# Altium PCB PCB_Fungnator.PcbDoc
Units mm, origin at the board's own origin, x right, y up, seen from the top; angles counter-clockwise.
Board outline 112.78 x 81.28 mm, 2 copper layers (Top Layer, Bottom Layer); 20 components, 21 nets, 100 pads, 0 vias.
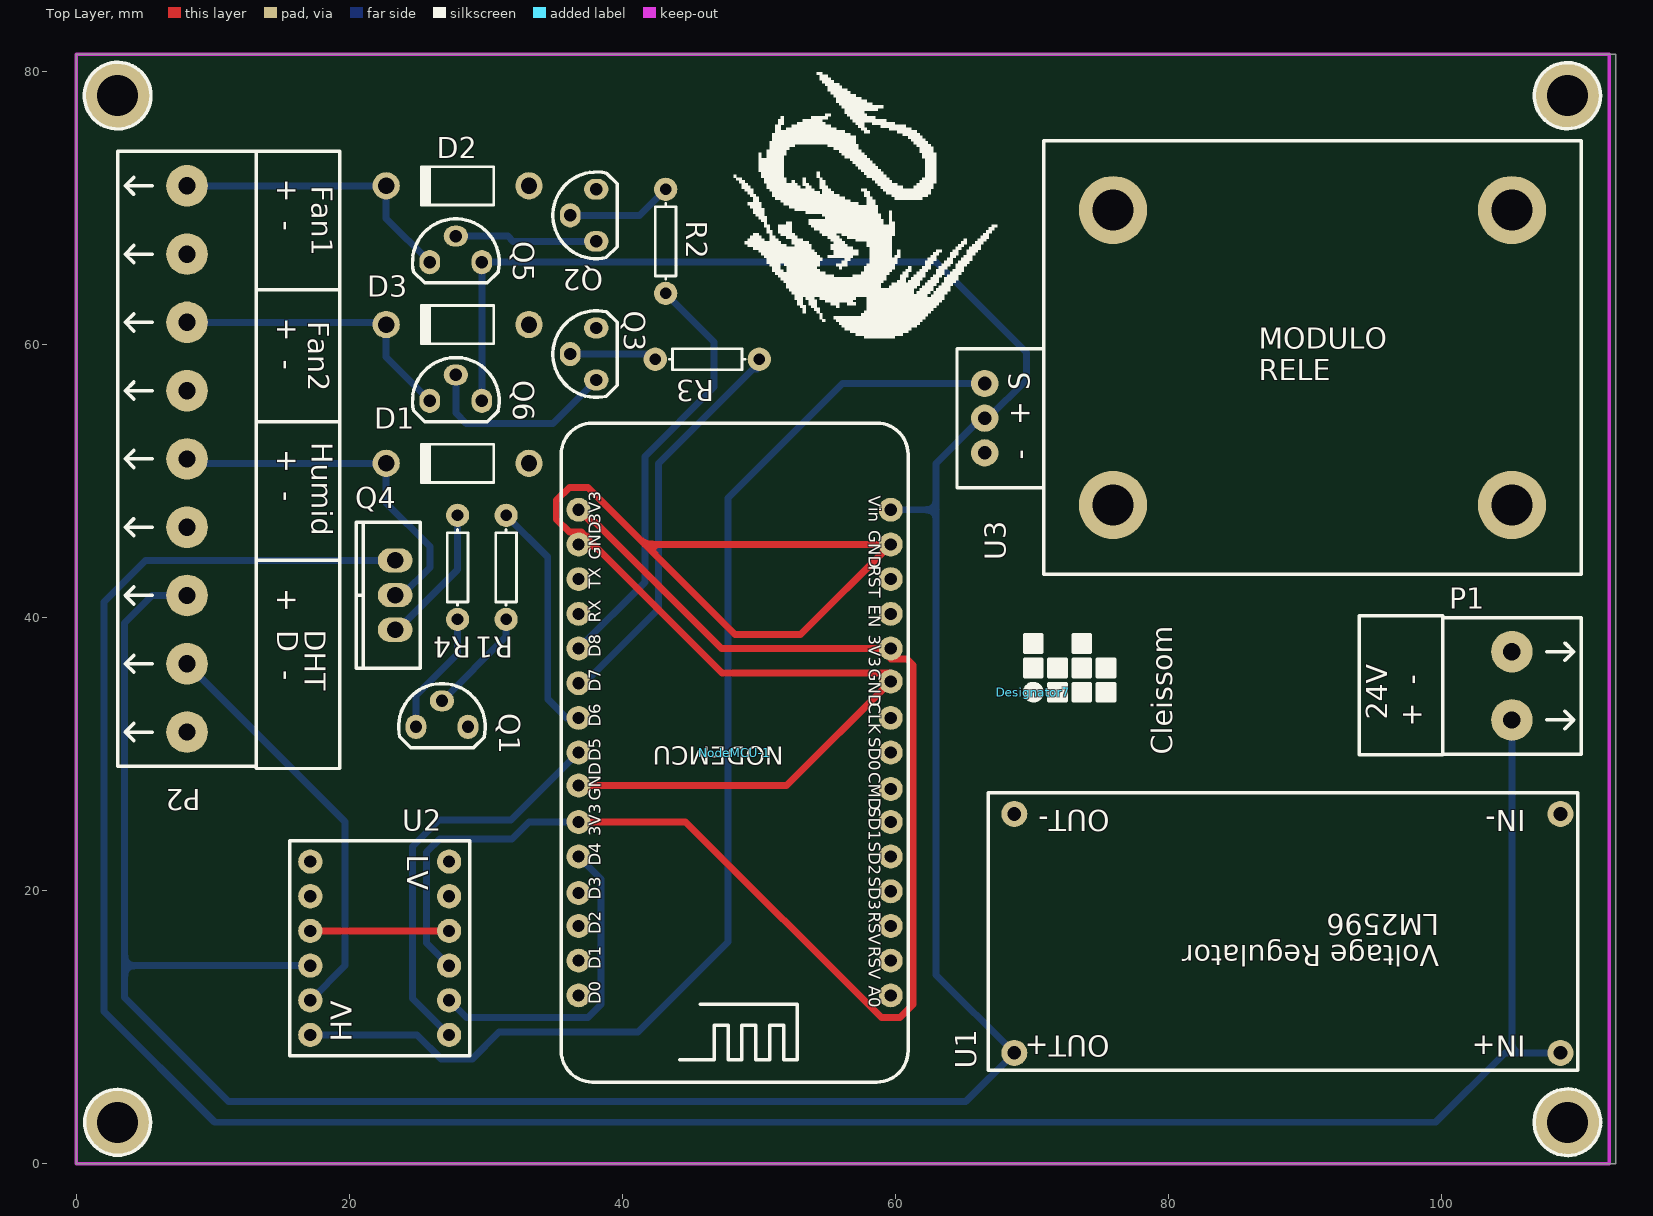
[diagram p0: Top Layer view]
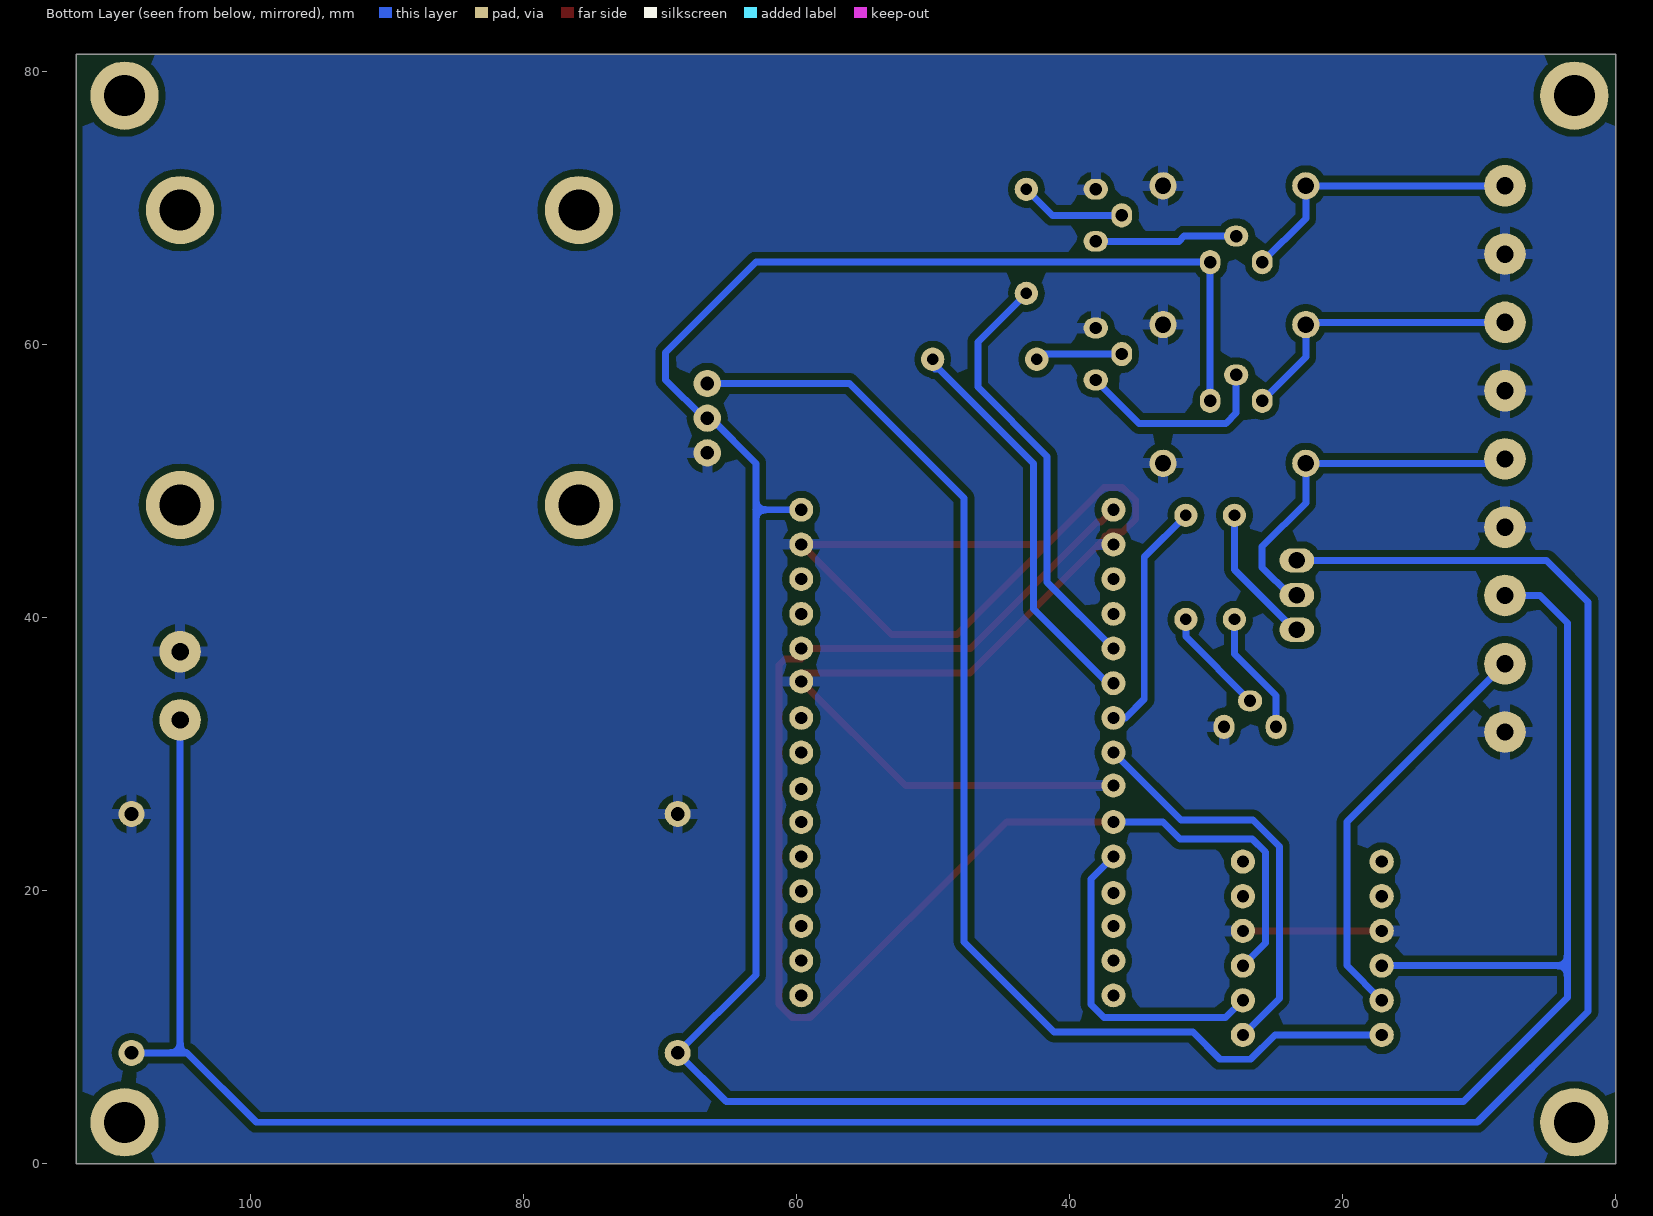
[diagram p1: Bottom Layer view, seen from below]

## Layer stack, top to bottom
Top Solder: solder mask 0.0102, Solder Resist, Dk 3.5
Top Layer: signal copper 0.0356
Dielectric 1: dielectric 0.32, FR-4, Dk 4.8
Bottom Layer: signal copper 0.0356
Bottom Solder: solder mask 0.0102, Solder Resist, Dk 3.5

## Board outline
0,0 112.776,0 112.776,81.28 0,81.28

## Design rules (kind name [scope] priority, off if disabled: settings)
Clearance [All] p1: gap=0.508
PlaneConnect [All] p1: planeconnectstyle=Relief reliefexpansion=0.508 reliefentries=4 reliefconductorwidth=0.508 reliefairgap=0.508
PolygonConnect [All] p1: connectstyle=Relief reliefconductorwidth=0.762 reliefentries=4 polygonreliefangle="90 Angle" airgapwidth=0.508
RoutingVias [All] p1: holewidth=0.711 width=1.27 viastyle="Through Hole" minholewidth=0.711 minwidth=1.27 maxholewidth=0.711 maxwidth=1.27
SilkToSilkClearance [All] p1: silktosilkclearance=0
SolderMaskExpansion [All] p1: expansion=0.102
Width [All] p1: maxlimit=1.016 minlimit=0.508 preferedwidth=0.508
28 further rules are at their usual default settings.

## Components (designator, comment, footprint, x,y, rotation, side; value= is the part's Value field where it differs from the comment)
D1 "Diode 1N4007" DO-41 27.94,51.308 r180 top
D2 "Diode 1N4007" DO-41 27.94,71.628 r180 top
D3 "Diode 1N4007" DO-41 27.94,61.468 r180 top
Designator7 "Comment" IFSC_SILK_SMALL 70.104,34.544 r90 top
NodeMCU-1 "NodeMCU V1.0 ESP-12E" "NodeMCU V1.0 ESP-12E" 60.96,6.096 r180 top
P1 "+24" KRE_2 105.156,32.512 r90 top
P2 "Terminal" KRE_9 8.128,71.628 r270 top
Q1 "BC547" TO-92/CBE 24.892,32.004 r0 top
Q2 "BC547" TO-92/CBE 38.1,67.564 r90 top
Q3 "BC547" TO-92/CBE 38.1,57.404 r90 top
Q4 "TIP32" TO-220/BCE 23.368,39.116 r90 top
Q5 "BC556" TO-92/CBE 25.908,66.04 r0 top
Q6 "BC556" TO-92/CBE 25.908,55.88 r0 top
R1 "Res1" AXIAL-0.3 31.496,43.688 r270 top
R2 "Res1" AXIAL-0.3 43.18,67.564 r90 top
R3 "Res1" AXIAL-0.3 46.228,58.928 r180 top
R4 "Res1" AXIAL-0.3 27.94,43.688 r90 top
U1 "LM2596" LM2596 108.712,8.128 r180 top
U2 "Conversor de nível" Conversor_Nivel 27.32,9.441 r90 top
U3 "Modulo Rele" MODULO_RELE 105.156,48.26 r90 top

## Footprints (in the part's own frame and the unit in brackets; to place one, negate y for a bottom-side part, rotate by r counter-clockwise, add the part's x,y. Pads: shape width x height; smd on the part's side, far side on the other; paste and mask are expansions set on the pad)
AXIAL-0.3 [mm] "Axial Device, Thru-Hole; 2 Leads; 0.3 in Pin Spacing"
  round 1.7 hole 0.85: 1(-3.81,0) 2(3.81,0)
  silkscreen extent -2.77,-0.76 2.77,0.76
Conversor_Nivel [mil]
  round 70 hole 35.43: 1(0,0) 2(100,0) 3(200,0) 4(300,0) 5(400,0) 6(500,0) 7(0,400) 8(100,400) 9(200,400) 10(300,400) 11(400,400) 12(500,400)
  silkscreen extent -60,-60 560,460
DO-41 [mm] "Diode, Axial; Body 5.2 x 2.7 mm (LxDia. max), Lead Dia. 0.86 mm (max)"
  round 2 hole 1.2: 1(-5.23,0) 2(5.23,0)
  silkscreen extent -2.65,-1.4 2.75,1.4
IFSC_SILK_SMALL [mm] "IFSC trademark small size"
  silkscreen extent -0.63,-5.97 4.19,0.64
KRE_2 [mil] "Terminal Block 2 pins"
  round 120 hole 50: 1(0,0) 2(196.85,0)
  silkscreen extent -98,-200 295,200, body extent -123,-190 294,216, height 559
KRE_9 [mil] "Terminal Block 9 pins"
  round 120 hole 50: 1(0,0) 2(196.85,0) 3(393.7,0) 4(590.55,0) 5(787.4,0) 6(984.25,0) 7(1181.1,0) 8(1377.95,0) 9(1574.8,0)
  silkscreen extent -100,-200 1673,200, body extent -123,-190 1672,216, height 559
LM2596 [mm] "LM2596 module"
  round 1.9 hole 1: 1(0,0) 2(0,-17.5) 3(40,0) 4(40,-17.5)
  silkscreen extent -1.27,-19.05 41.91,1.27
MODULO_RELE [mm]
  round 5 hole 3: 0(0,29.21) 0(0,0) 0(21.59,29.21) 0(21.59,0)
  round 2 hole 1: 1(8.89,38.608) 2(6.35,38.608) 3(3.81,38.608)
  silkscreen extent -5.08,-5.08 26.67,40.64
"NodeMCU V1.0 ESP-12E" [mil]
  round 69 hole 35: 3V3(51,-1246) 3V3(951,-746) 3V3(951,-1646) A0(51,-246) CLK(51,-1046) CMD(51,-841) D0(951,-246) D1(951,-346) D2(951,-446) D3(951,-541) D4(951,-646) D5(951,-946) D6(951,-1046) D7(951,-1146) D8(951,-1246) EN(51,-1346) GND(51,-1151) GND(51,-1546) GND(951,-851) GND(951,-1546) RST(51,-1446) RSV(51,-346) RSV(51,-446) RX(951,-1346) SD0(51,-946) SD1(51,-746) SD2(51,-646) SD3(51,-546) TX(951,-1446) VIN(51,-1646)
  silkscreen extent 1,-1896 1001,4
TO-92/CBE [mil] "Transistor Outline Package, Case Style 92 CBE; 3D Sergey Atanov"
  oval 70x60 hole 35.43: B(75,75)
  oval 60x70 hole 35.43: C(0,0) E(150,0)
  silkscreen extent -50,-60 200,125, body extent -37,-50 187,100, height 239
TO-220/BCE [mm] "TO, Thru-Hole, Vertical, Heatsink Mounted; 3 In-Line Leads; Pitch 2.54 mm"
  oval 1.778x2.54 hole 1.2: B(0,0) C(2.54,0) E(5.08,0)
  silkscreen extent -2.81,-1.85 7.89,2.85, body extent -3.07,-1.49 8.15,3.2, height 21.13

## Part data
D1 D2 D3: "1 Amp General Purpose Rectifier"
NodeMCU-1: "NodeMCU V1.0 ESP8266 (ESP-12E)"
P1: library part KRE_2, "Terminal Block 1x2"
P2: library part KRE_9, "Terminal Block 1x9"
Q1 Q2 Q3: "NPN Epitaxial Silicon Transistor"
Q4 Q5 Q6: "PNP Epitaxial Silicon Transistor"
R1 R2 R3 R4: "Resistor"

## Free pads (board coordinates)
  round 5 hole 3: 0(3.048,3.048) 0(3.048,78.232) 0(109.22,3.048) 0(109.22,78.232)

## Nets (pads, with @x,y where several pads share a name; then routed paths per layer and width w, separated by ;. In a path a pad name is that pad's centre, name@x,y a point inside that pad or via, vN(x,y) a via of type N, cw(c..) or ccw(c..) an arc to the next point about the centre after c; other vN are vias at no path point)
+3.3: NodeMCU-1.3V3 U2.3 U2.5 U2.6 U2.11 U2.12 | length 106.4
  Top Layer w0.508: NodeMCU-1.3V3@36.805,25.044 44.648,25.044 58.986,10.706 60.343,10.706 61.303,11.666 61.303,36.523 60.857,36.97 59.665,36.97 59.665,37.744 47.255,37.744 37.997,47.003 37.706,47.003 NodeMCU-1.3V3@36.805,47.904
  Bottom Layer w0.508: U2.3 25.669,16.172 25.669,22.825 26.636,23.792 31.92,23.792 33.172,25.044 NodeMCU-1.3V3@36.805,25.044
+5: NodeMCU-1.VIN P2.7 Q5.E Q6.E U1.3 U2.9 U3.2 | length 229
  Bottom Layer w0.508: 3.556,14.521 U2.9 ; P2.7 5.56,41.628 3.556,39.624 3.556,12.192 11.176,4.572 65.156,4.572 U1.3 62.992,13.848 62.992,47.904 ; Q6.E Q5.E 62.992,66.04 69.596,59.436 69.596,57.404 66.802,54.61 U3.2 66.294,54.61 62.992,51.308 62.992,47.904 ; NodeMCU-1.VIN 62.992,47.904
+24: P1.1 Q4.E U1.1 | length 189.1
  Bottom Layer w0.508: Q4.E 5.08,44.196 2.032,41.148 2.032,11.176 10.16,3.048 99.568,3.048 104.648,8.128 U1.1 ; 105.156,8.128 P1.1
DHT: P2.8 U2.8 | length 30.5
  Bottom Layer w0.508: P2.8 19.7,25.056 19.7,14.521 U2.8
FAN1: NodeMCU-1.D8 R2.1 | length 31.9
  Bottom Layer w0.508: NodeMCU-1.D8 41.656,42.596 41.656,51.816 46.736,56.896 46.736,60.198 R2.1 R2.1@43.18,63.5
FAN1+: D2.2 P2.1 Q5.C | length 21.5
  Bottom Layer w0.508: P2.1 D2.2 22.71,69.238 Q5.C
FAN2: NodeMCU-1.D7 R3.1 | length 29.9
  Bottom Layer w0.508: NodeMCU-1.D7 37.236,35.204 42.672,40.64 42.672,51.308 49.592,58.228 49.889,58.228 49.613,58.503 R3.1
FAN2+: D3.2 P2.3 Q6.C | length 21.6
  Bottom Layer w0.508: P2.3 22.55,61.628 D3.2 22.71,59.078 Q6.C
GND: D1.1 D2.1 D3.1 NodeMCU-1.GND P1.2 P2.2 P2.4 P2.6 P2.9 Q1.E Q2.E Q3.E U1.2 U1.4 U2.4 U2.10 U3.3 | length 125.2
  Top Layer w0.508: U2.10 U2.4 ; NodeMCU-1.GND@36.805,27.711 52.045,27.711 59.665,35.331 59.665,35.954 47.318,35.954 NodeMCU-1.GND@37.427,45.845 ; NodeMCU-1.GND@36.805,45.364 37.908,45.364 NodeMCU-1.GND@37.427,45.845 ; NodeMCU-1.GND@37.427,45.845 37.427,45.987 37.285,45.987 37.006,46.266 36.126,46.266 35.166,47.226 35.166,48.583 36.126,49.543 37.483,49.543 ; 37.483,49.543 48.265,38.76 53.061,38.76 59.665,45.364 41.661,45.364 37.483,49.543
HUMIDIFIER: NodeMCU-1.D6 R1.1 | length 17.6
  Bottom Layer w0.508: R1.1 34.544,44.45 34.544,34.036 35.916,32.664 NodeMCU-1.D6
HUMIDIFIER+: D1.2 P2.5 Q4.C | length 27
  Bottom Layer w0.508: P2.5 8.448,51.308 D1.2 22.71,48.41 25.908,45.212 25.908,43.688 23.876,41.656 Q4.C
NetNodeMCU-1_D4: NodeMCU-1.D4 U2.2 | length 23.6
  Bottom Layer w0.508: U2.2 28.595,10.706 37.483,10.706 38.443,11.666 38.443,20.866 NodeMCU-1.D4
NetNodeMCU-1_D5: NodeMCU-1.D5 U2.1 | length 29.9
  Bottom Layer w0.508: U2.1 24.653,12.108 24.653,23.246 26.596,25.189 31.87,25.189 NodeMCU-1.D5
NetQ1_B: Q1.B R1.2 | length 7.9
  Bottom Layer w0.508: Q1.B 31.496,38.608 R1.2
NetQ1_C: Q1.C R4.1 | length 9.1
  Bottom Layer w0.508: Q1.C 24.892,34.286 27.94,37.334 R4.1
NetQ2_B: Q2.B R2.2 | length 7.8
  Bottom Layer w0.508: Q2.B 41.275,69.469 R2.2
NetQ2_C: Q2.C Q5.B | length 10.4
  Bottom Layer w0.508: Q5.B 31.623,67.945 32.004,67.564 Q2.C
NetQ3_B: Q3.B R3.2 | length 6.4
  Bottom Layer w0.508: Q3.B 42.037,59.309 R3.2
NetQ3_C: Q3.C Q6.B | length 14.7
  Bottom Layer w0.508: Q6.B 27.813,54.991 28.575,54.229 34.925,54.229 Q3.C
NetQ4_B: Q4.B R4.2 | length 10.4
  Bottom Layer w0.508: Q4.B 23.544,39.116 27.94,43.512 R4.2
NetU2_7: U2.7 U3.1 | length 89.7
  Bottom Layer w0.508: U2.7 24.985,9.441 26.763,7.663 28.999,7.663 30.988,9.652 41.148,9.652 47.752,16.256 47.752,48.768 56.134,57.15 U3.1
pads on no net: NodeMCU-1.A0 NodeMCU-1.CLK NodeMCU-1.CMD NodeMCU-1.D0 NodeMCU-1.D1 NodeMCU-1.D2 NodeMCU-1.D3 NodeMCU-1.EN NodeMCU-1.RST NodeMCU-1.RSV NodeMCU-1.RX NodeMCU-1.SD0 NodeMCU-1.SD1 NodeMCU-1.SD2 NodeMCU-1.SD3 NodeMCU-1.TX U3.0

## Polygon pours and split planes (outlines as drawn)
GND on Bottom Layer "GND_L02_P-001" (solid, remove dead copper, pour order 0): 0,81.28 112.268,81.28 112.268,0 0,0

## Keep-outs
Top Layer:
  lines w0.254: 0,0 0,81.28 112.268,81.28 112.268,0 0,0

## Silkscreen, mask and mechanical layers (free items; w line width, h text height)
Top Overlay:
  drawing of 37 lines, arcs and shapes, not listed
  text "+  -" at 14.732,72.136 h1.52 r270
  text "Fan1" at 17.272,71.628 h1.52 r270
  text "+  -" at 14.732,61.976 h1.52 r270
  text "Fan2" at 17.018,61.722 h1.52 r270
  text "Humid" at 17.272,52.832 h1.52 r270
  text "+  -" at 14.732,52.324 h1.52 r270
  text "+  D  -" at 14.732,42.164 h1.52 r270
  text "DHT" at 16.764,39.116 h1.52 r270
  text "24V" at 96.012,32.512 h1.52 r90
  text "+  -" at 98.552,32.004 h1.52 r90
  text "Cleissom" at 80.264,29.972 h1.52 r90

## Text inside footprints (layer, text, board x,y; h text height)
NodeMCU-1: Top Overlay "GND" at 57.76,36.271 h1.52 r270; Top Overlay "3V3" at 57.76,38.735 h1.52 r270; Top Overlay "EN" at 57.76,40.945 h1.52 r270; Top Overlay "RST" at 57.76,43.79 h1.52 r270; Top Overlay "GND" at 57.76,46.406 h1.52 r270; Top Overlay "Vin" at 57.76,48.946 h1.52 r270; Top Overlay "D7" at 38.71,34.575 h1.52 r90; Top Overlay "D8" at 38.71,37.112 h1.52 r90; Top Overlay "RX" at 38.71,39.625 h1.52 r90; Top Overlay "TX" at 38.71,42.139 h1.52 r90; Top Overlay "GND" at 38.71,44.252 h1.52 r90; Top Overlay "3V3" at 38.71,46.888 h1.52 r90; Top Overlay "D6" at 38.71,32.007 h1.52 r90; Top Overlay "CMD" at 57.76,28.68 h1.52 r270; Top Overlay "D0" at 38.71,11.684 h1.52 r90; Top Overlay "D1" at 38.71,14.258 h1.52 r90; Top Overlay "D2" at 38.71,16.804 h1.52 r90; Top Overlay "D3" at 38.71,19.344 h1.52 r90; Top Overlay "D4" at 38.71,21.844 h1.52 r90; Top Overlay "3V3" at 38.71,24.003 h1.52 r90; Top Overlay "GND" at 38.71,26.594 h1.52 r90; Top Overlay "D5" at 38.71,29.489 h1.52 r90; Top Overlay "A0" at 57.76,13.03 h1.52 r270; Top Overlay "RSV" at 57.76,15.926 h1.52 r270; Top Overlay "RSV" at 57.76,18.477 h1.52 r270; Top Overlay "SD3" at 57.76,21.028 h1.52 r270; Top Overlay "SD2" at 57.76,23.578 h1.52 r270; Top Overlay "SD1" at 57.76,26.129 h1.52 r270; Top Overlay "SD0" at 57.76,31.231 h1.52 r270; Top Overlay "CLK" at 57.76,33.782 h1.52 r270; Top Overlay "NODEMCU" at 51.816,30.988 h2.29 r180
U1: Top Overlay "Voltage Regulator / LM2596" at 99.822,18.288 h1.52 r180; Top Overlay "IN-" at 106.172,25.908 h1.52 r180; Top Overlay "IN+" at 106.172,9.398 h1.52 r180; Top Overlay "OUT+" at 75.692,9.398 h1.52 r180; Top Overlay "OUT-" at 75.692,25.908 h1.52 r180
U2: Top Overlay "LV" at 24.272,22.649 h1.52 r270; Top Overlay "HV" at 20.208,8.933 h1.52 r90
U3: Top Overlay "MODULO / RELE" at 86.614,57.404 h1.52; Top Overlay "S" at 69.85,56.642 h1.52 r90; Top Overlay "+" at 69.85,54.102 h1.52 r90; Top Overlay "-" at 69.85,51.562 h1.52 r90